# Altium PCB SB_Motor_Driver_Module.PcbDoc
Units mm, origin at the board's own origin, x right, y up, seen from the top; angles counter-clockwise.
Board outline 74.1 x 39.4 mm, 2 copper layers (Top Layer, Bottom Layer), stack 1.569 mm thick; 31 components, 21 nets, 86 pads, 7 vias.
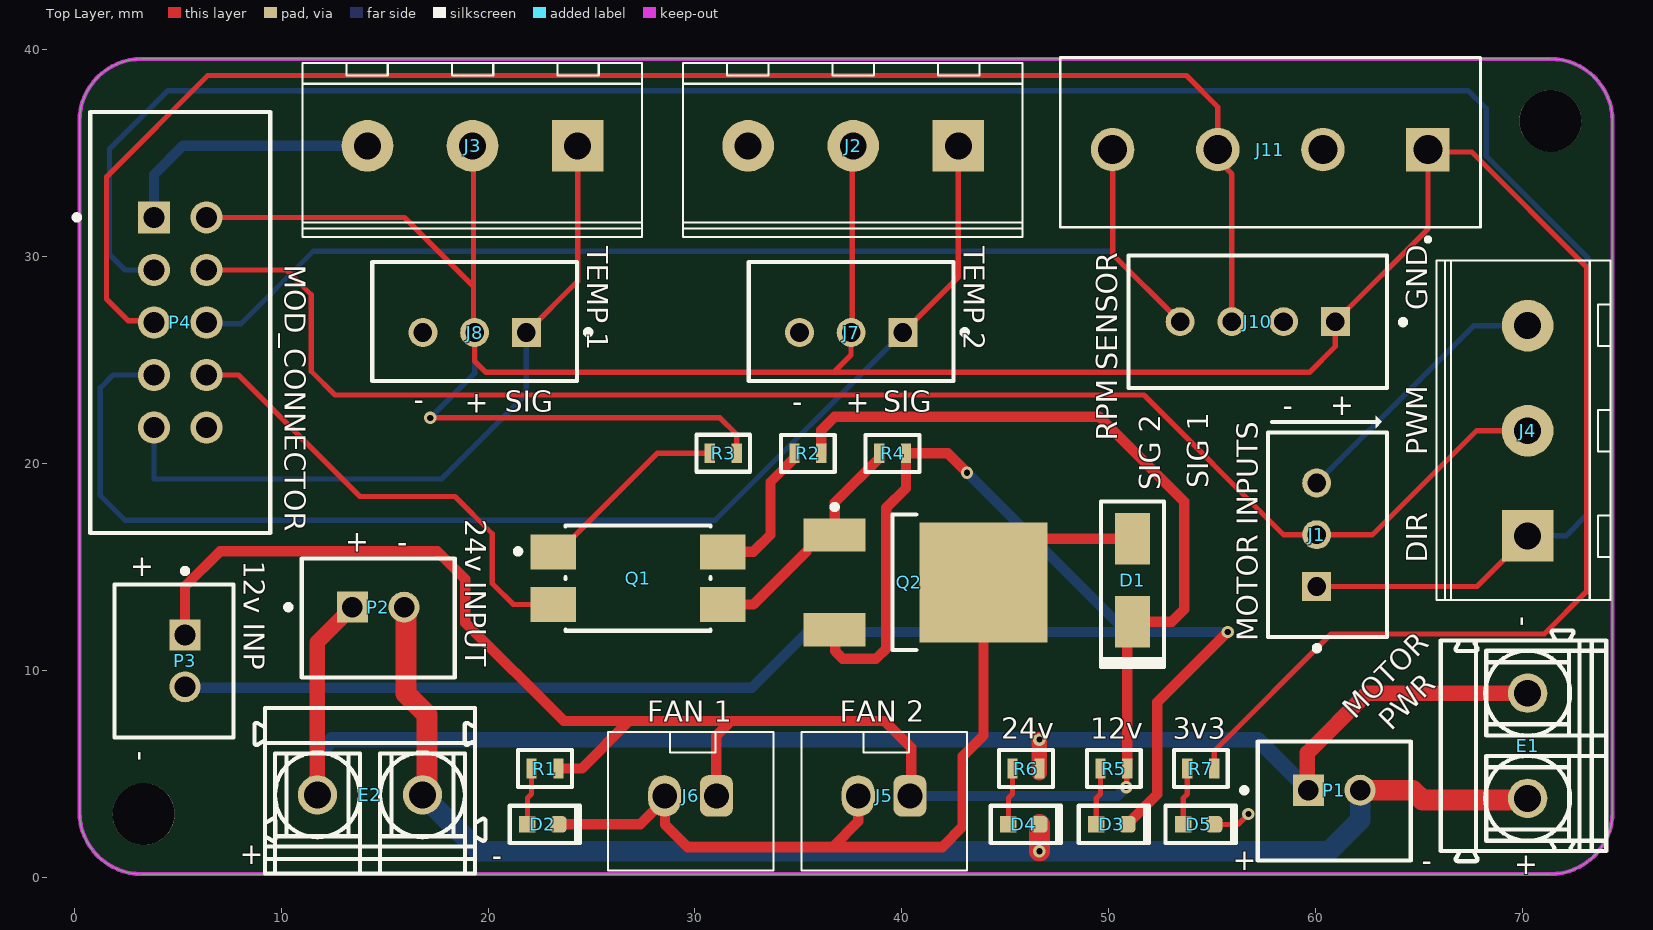
[diagram p0: Top Layer view]
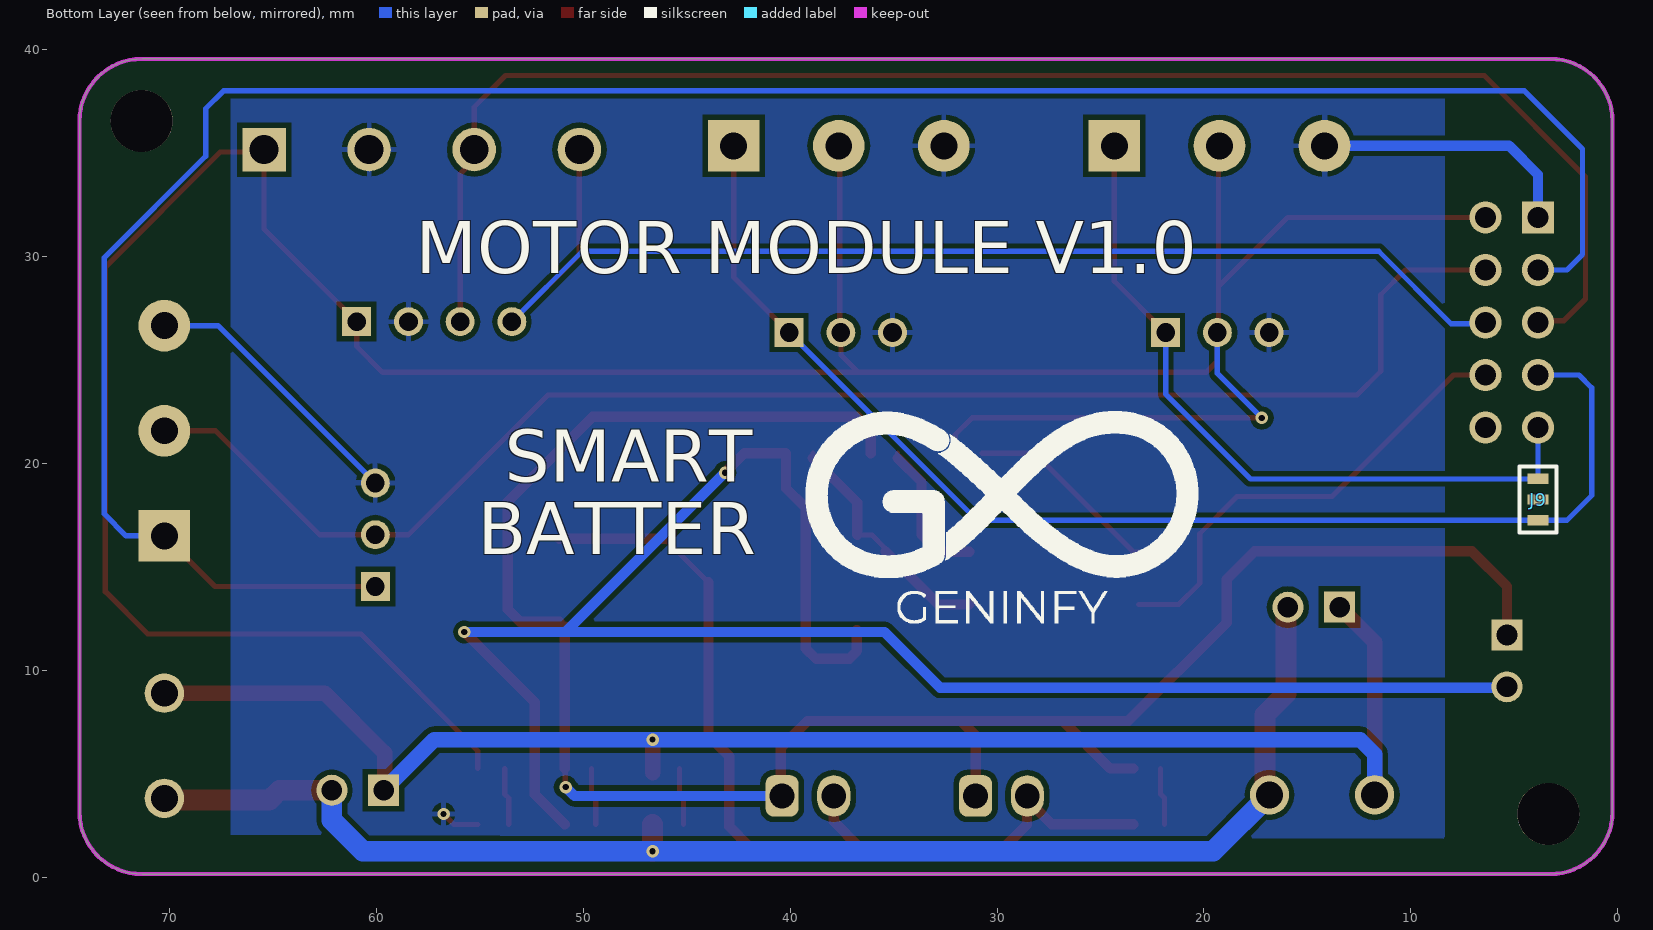
[diagram p1: Bottom Layer view, seen from below]
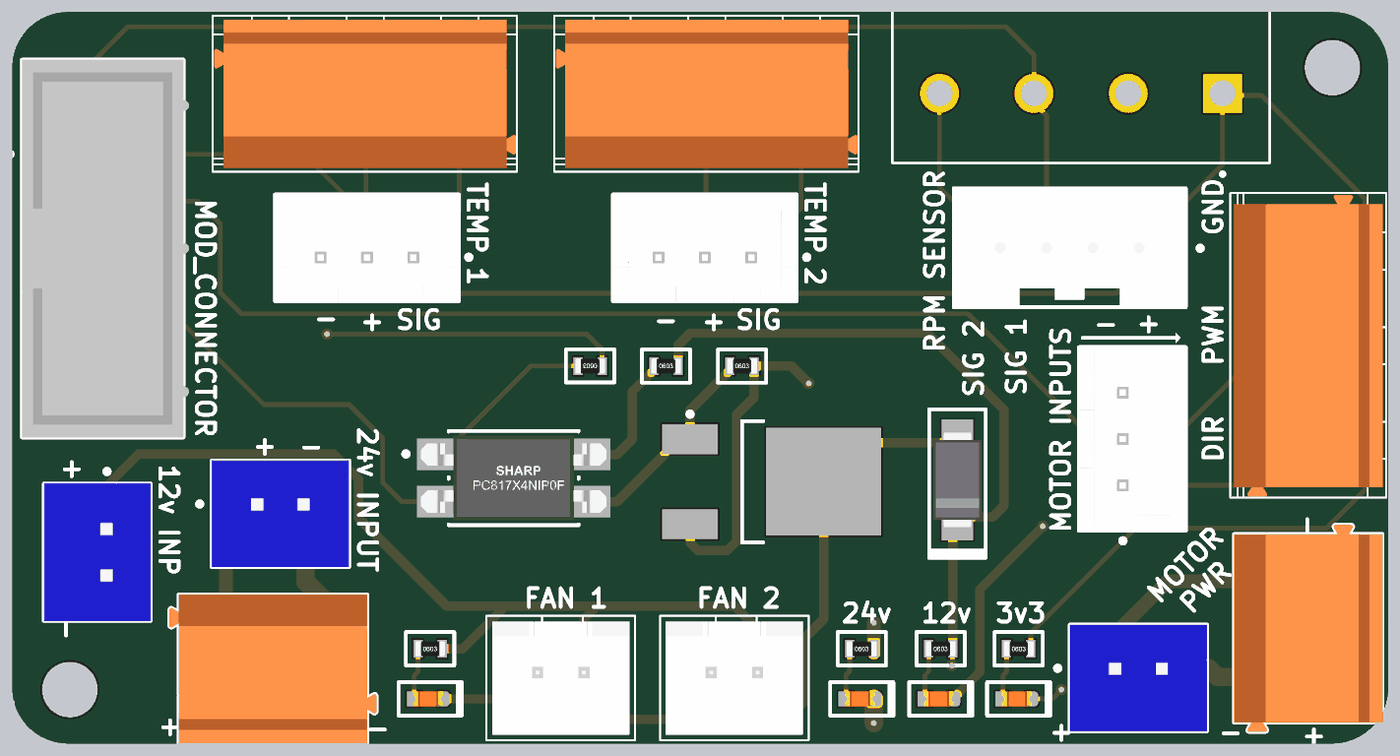
[diagram p2: 3D render of the assembled board from above, using the file's embedded part models]

## Layer stack, top to bottom
Top Solder: solder mask 0.0254, SM-001, Dk 4
Top Layer: signal copper 0.035
Dielectric 1: core 1.4986, Core-043, Dk 4.3
Bottom Layer: signal copper 0.035
Bottom Solder: solder mask 0.0254, SM-001, Dk 4

## Board outline
71.35,39.55 cw(c71.35,36.55) 74.35,36.55 74.35,3.15 cw(c71.35,3.15) 71.35,0.15 3.25,0.15 cw(c3.25,3.15) 0.25,3.15 0.25,36.55 cw(c3.25,36.55) 3.25,39.55

## Design rules (kind name [scope] priority, off if disabled: settings)
Clearance [All] p1: gap=0.254 ignorepadtopadclearanceinfootprint=FALSE
HoleSize [All] p1: absolutevalues=TRUE maxlimit=4 minlimit=0.025 maxpercent=80.000 minpercent=20.000
PolygonConnect [All] p1: connectstyle=Relief reliefconductorwidth=0.254 reliefentries=4 polygonreliefangle="90 Angle" airgapwidth=0.254
RoutingVias [All] p1: holewidth=0.711 width=1.27 viastyle="Through Hole" minholewidth=0.711 minwidth=1.27 maxholewidth=0.711 maxwidth=1.27
SilkToSolderMaskClearance [IsPad] p1: minsilkscreentomaskgap=0.2 clearancetoexposedcopper=TRUE
SolderMaskExpansion [All] p1: expansion=0.102 istentingtop=FALSE
Width [All] p1: maxlimit=2 minlimit=0.254 preferedwidth=0.254
28 further rules are at their usual default settings.

## Components (designator, comment, footprint, x,y, rotation, side; value= is the part's Value field where it differs from the comment)
D1 "1N4007" "M7 1N4007 SMA" 51.15,14.35 r270 top
D2 "LED - Orange" LED0603-Orange 22.65,2.55 r180 top
D3 "LED - Orange" LED0603-Orange 50.15,2.55 r180 top
D4 "LED - Orange" LED0603-Orange 45.9,2.55 r180 top
D5 "LED - Orange" LED0603-Orange 54.35,2.55 r180 top
E1 "1760490000" PM_5_08_90_02 70.05,6.35 r90 top
E2 "1760490000" PM_5_08_90_02 14.29,4.175 r0 top
J1 "B3B-XH-A(LF)(SN)" FP-B3B-XH-A_LF_SN-MFG 60.575,16.55 r90 top
J2 "Screw Terminal" "Screw Terminal 3P 5.08MM" 37.65,35.35 r180 top
J3 "Screw Terminal" "Screw Terminal 3P 5.08MM" 19.25,35.35 r180 top
J4 "Screw Terminal" "Screw Terminal 3P 5.08MM" 70.25,21.576 r90 top
J5 "JST-XH 2P" "JST-XH 2P" 39.141,3.925 r0 top
J6 "JST-XH 2P" "JST-XH 2P" 29.786,3.925 r0 top
J7 "B3B-XH-A(LF)(SN)" FP-B3B-XH-A_LF_SN-MFG 37.55,26.85 r180 top
J8 "B3B-XH-A(LF)(SN)" FP-B3B-XH-A_LF_SN-MFG 19.35,26.85 r180 top
J9 "Solder Jumper" "Solder Jumper" 3.85,18.25 r90 bottom
J10 "B04B-XASK-1(LF)(SN)" FP-B04B-XASK-1_LF_SN-MFG 57.2,26.85 r0 top
J11 "1776119-4" TE_1776119-4 57.81,35.168 r180 top
P1 "B2B-XH-A(LF)(SN)" JST-B2B-XH-A_V 60.9,4.2 r0 top
P2 "B2B-XH-A(LF)(SN)" JST-B2B-XH-A_V 14.69,13.05 r0 top
P3 "B2B-XH-A(LF)(SN)" JST-B2B-XH-A_V 5.35,10.45 r270 top
P4 "1-1634688-0" TECO-1-1634688-0-10_V 5.12,26.81 r270 top
Q1 "PC817X4NIP0F" FP-PC817X4NIP0F-MFG 27.25,14.45 r0 top
Q2 "NTD4805NT4G" ONSC-DPAK-3-369AA-01_V 41.15,14.25 r0 top
R1 "68R" "68R 0603" 22.75,5.25 r0 top
R2 "1k" "R0603 1k" 35.458,20.483 r0 top
R3 "1k" "R0603 1k" 31.367,20.483 r180 top
R4 "1k" "R0603 1k" 39.55,20.483 r0 top
R5 "68R" "68R 0603" 50.25,5.25 r0 top
R6 "68R" "68R 0603" 46,5.25 r0 top
R7 "68R" "68R 0603" 54.45,5.25 r0 top

## Footprints (in the part's own frame and the unit in brackets; to place one, negate y for a bottom-side part, rotate by r counter-clockwise, add the part's x,y. Pads: shape width x height; smd on the part's side, far side on the other; paste and mask are expansions set on the pad)
"68R 0603" [mm]
  rect 0.5x0.95 smd: 1(-0.65,0) 2(0.65,0)
  silkscreen extent -1.3,-0.9 1.3,0.9, body extent -0.8,-0.4 0.8,0.4, height 0.45
FP-B3B-XH-A_LF_SN-MFG [mm]
  rect 1.4x1.4 hole 0.9 paste-1000 mask+0: 1(-2.5,0.525)
  round 1.4 hole 0.9 paste-1000 mask+0: 2(0,0.525) 3(2.5,0.525)
  silkscreen extent -5.61,-2.88 4.95,2.88, body extent -5.05,-2.98 5.05,2.98, height 0.25
FP-B04B-XASK-1_LF_SN-MFG [mm]
  rect 1.4x1.4 hole 0.9 paste-1000 mask+0: 1(3.75,0)
  round 1.4 hole 0.9 paste-1000 mask+0: 2(1.25,0) 3(-1.25,0) 4(-3.75,0)
  silkscreen extent -6.25,-3.2 7.15,3.2, body extent -6.35,-3.3 6.35,3.3, height 0.25
FP-PC817X4NIP0F-MFG [mm]
  rect 2.2x1.7 smd paste+0 mask+0: 1(-4.1,1.27) 2(-4.1,-1.27) 3(4.1,-1.27) 4(4.1,1.27)
  silkscreen extent -5.92,-2.54 3.5,2.54, body extent -5.3,-2.64 5.3,2.64, height 0.25
JST-B2B-XH-A_V [mm] "Header, 2-Leads, Body 7.4x5.75mm, Pitch 2.5mm"
  rect 1.5x1.5 hole 1: 1(-1.25,0)
  round 1.5 hole 1: 2(1.25,0)
  silkscreen extent -4.47,-3.4 3.7,2.35, body extent -3.7,-3.4 3.7,2.35, height 7
"JST-XH 2P" [mm]
  rrect50% 1.6x2 hole 1.2: 1(1.25,0)
  oval 1.6x2 hole 1.2: 2(-1.25,0)
  silkscreen extent -4,-3.6 4,3.1, body extent -3.7,-3.3 3.7,2.8, height 7.01
LED0603-Orange [mm]
  rrect50% 0.8x0.8 smd: 1(-0.75,0)
  rect 0.8x0.8 smd: 2(0.75,0)
  silkscreen extent -1.8,-0.9 1.6,1, body extent -0.8,-0.4 0.8,0.4, height 0.7
"M7 1N4007 SMA" [mm]
  rect 2.5x1.7 smd: 1(-2,0) 2(2,0)
  silkscreen extent -3.8,-1.6 4.2,1.52, body extent -2.6,-1.3 2.6,1.3, height 2.42
ONSC-DPAK-3-369AA-01_V [mm] "DPAK, 3-Leads, Body 6.54x6.095mm, Pitch 2.29mm"
  rect 3x1.6 smd: 1(-4.4,2.29) 3(-4.4,-2.29)
  rect 6.2x5.8 smd: 4(2.8,0)
  silkscreen extent -4.52,-3.27 -0.45,3.76, body extent -1.6,-3.27 4.49,3.27, height 2.47
PM_5_08_90_02 [mm] "PM 5.08/02/90 3.5"
  round 1.9 hole 1.3: A1(-2.54,-0.2) A2(2.54,-0.2)
  silkscreen extent -5.58,-4 5.58,4, body extent -5.58,-4 5.58,4, height 10.01
"R0603 1k" [mm]
  rect 0.5x0.95 smd: 1(-0.65,0) 2(0.65,0)
  silkscreen extent -1.3,-0.9 1.3,0.89, body extent -0.8,-0.4 0.8,0.4, height 0.45
"Screw Terminal 3P 5.08MM" [mm]
  rect 2.5x2.5 hole 1.3: 1(-5.08,0)
  round 2.5 hole 1.3: 2(0,0) 3(5.08,0)
  silkscreen extent -8.18,-4 8.22,4.4, body extent -8.12,-3.8 8.12,4.2, height 10.01
"Solder Jumper" [mm]
  rect 0.5x1 smd: 1(-1,0) 2(0,0) 3(1,0)
  silkscreen extent -1.6,-0.9 1.6,0.9
TE_1776119-4 [mm]
  rect 2.1x2.1 hole 1.4: 1(-7.62,0)
  round 2.1 hole 1.4: 2(-2.54,0) 3(2.54,0) 4(7.62,0)
  silkscreen extent -10.16,-4.45 10.16,4.45
TECO-1-1634688-0-10_V [mm] "10-Pin Connector, Body 20.35x8.7mm, Pitch 2.54mm"
  rect 1.55x1.55 hole 1.02: 1(-5.08,-1.27)
  round 1.55 hole 1.02: 2(-5.08,1.27) 3(-2.54,-1.27) 4(-2.54,1.27) 5(0,-1.27) 6(0,1.27) 7(2.54,-1.27) 8(2.54,1.27) 9(5.08,-1.27) 10(5.08,1.27)
  silkscreen extent -10.18,-5.12 10.18,4.35, body extent -10.17,-4.35 10.18,4.65, height 9

## Part data
D1: library part 1N4007FLTR, "1000V 1A Rectifier", Manufacturer="Sangdest Microelectronics", Supplier Part Number 1=1655-1N4007FLCT-ND, Manufacturer Part Number=1N4007FLTR, Pricing 1="1=0.10000, 10=0.06600, 100=0.03120, 500=0.01848, 1000=0.01241 (USD)", RoHS=No, Stock 1=2517, Supplier 1=Digi-Key
D2 D3 D4 D5: library part LTST-C191KFKT, "LED ORANGE CLEAR SMD", Case Code (Imperial)=0603, Case Code (Metric)=1608, Color=Orange, Forward Current=30mA, Forward Voltage=2V, Lens Color=Colorless, Manufacturer="Vishay Lite-On", Max Operating Temperature=85°C, Min Operating Temperature=-55°C, Package Quantity=1, Power Dissipation=75mW, Reverse Voltage=5V, Supplier Part Number 1=160-1445-1-ND, Test Current=20mA, Case/Package=0603, Category=LEDs, ComponentLink1Description=https://datasheet.ciiva.com/2109/ltst-c191kfkt-2109968.pdf?src-supplier=Digi-Key, ComponentLink1URL=https://datasheet.ciiva.com/2109/ltst-c191kfkt-2109968.pdf?src-supplier=Digi-Key, ComponentLink2Description=https://datasheet.ciiva.com/12400/100-ltst-c191kfkt-39904-12400811.pdf?src-supplier=Mouser, ComponentLink2URL=https://datasheet.ciiva.com/12400/100-ltst-c191kfkt-39904-12400811.pdf?src-supplier=Mouser, ComponentLink3Description=https://datasheet.ciiva.com/11775/0900766b80dc02b0-11775613.pdf?src-supplier=RSComponents, ComponentLink3URL=https://datasheet.ciiva.com/11775/0900766b80dc02b0-11775613.pdf?src-supplier=RSComponents, ComponentLink4Description=https://datasheet.ciiva.com/15201/getdatasheetpartid-631075-15201391.pdf?src-supplier=Verical, ComponentLink4URL=https://datasheet.ciiva.com/15201/getdatasheetpartid-631075-15201391.pdf?src-supplier=Verical, ComponentLink5Description=https://datasheet.ciiva.com/2109/s-110-ltst-c191kfkt-2109969.pdf?src-supplier=Digi-Key, ComponentLink5URL=https://datasheet.ciiva.com/2109/s-110-ltst-c191kfkt-2109969.pdf?src-supplier=Digi-Key, Depth=0.8mm, Dominant Wavelength=605nm, Height=0.55mm, Illumination Color=Orange, Lead Free="Lead Free", Length=1.6mm, Lens Style=Diffused,Colorless,Rectangular, Lens Transparency=Clear, Luminous Intensity=90mcd, Manufacturer Part Number=LTST-C191KFKT, Mount="Surface Mount", Number of Elements=1, Number of LEDs=1, Number of Pins=2, Packaging="Tape and Reel", Power Rating=75mW, Pricing 1="1=0.24000, 10=0.17900, 100=0.08460, 500=0.05640, 1000=0.04418, 2500=0.04324 (USD)", Radiation Hardening=No, RoHS=Yes, Stock 1=92562, Supplier 1=Digi-Key, Viewing Angle=130°, Wavelength=611nm, Width=0.8mm
E1 E2: library part CMP-1559-01627-1, "OMNIMATE Signal - series PM", Colour=Orange, Manufacturer=Weidmueller, Rated_current_use_group_B_UL_1059="15 A", Rated_voltage_for_surge_voltage_class_pollution_degree_II_2="600 V", Rated_voltage_use_group_B_UL_1059="300 V", UL_94_flammability_rating=V-0, ComponentLink1Description="Manufacturer URL", ComponentLink1URL=http://www.weidmueller.com/, ComponentLink2Description="URL Link1", ComponentLink2URL=http://catalog.weidmueller.com/catalog/Start.do?localeId=en&ObjectID=1760490000, Contact_material=Cu-Leg, Contact_surface=tinned, Insulating_material="Wemid (PA)", Mounting_onto_the_PCB="Solder connection", No_of_poles=2, PackageReference=PM_5_08_90_02, Packaging=Box, PartNumber=1760490000, Pitch_inch="0,2 inch", Pitch_mm="5,08 mm", Qty="500 PCS", Revision=V1, Short_text_for_material="PM 5.08/02/90 3.5SN OR BX", Side_termination_characteristic="closed side", Solder_pin_length_mm="3,5 mm", Solid_max_H05_07_V_U="2,5 mm²", Solid_min_H05_07_V_U="0,13 mm²", Wire_cross_section_AWG_max_UL_1059="AWG 14", Wire_cross_section_AWG_min_UL_1059="AWG 26"
J1 J7 J8: library part CMP-17439-000014-1, "CONN HEADER VERT 3POS 2.5MM", Current Rating=3A, Manufacturer=JST, Package=0, Temperature="-25°C to +85°C", Temperature Range High=+85°C, Temperature Range Low=-25°C, Voltage Rating=250V, Automotive=No, Category=Conn, ComponentLink2Description=Datasheet, ComponentLink2URL=https://www.jst-mfg.com/product/pdf/eng/eXH.pdf, Conn Gender=Male, Conn Orientation=Vertical, Contact Material=Tin,Copper, Device Class L1=Connectors, Device Class L2="Headers and Wire Housings", Device Class L3=unset, Digikey Description="CONN HEADER VERT 3POS 2.5MM", Height=7mm, Lead Free=Yes, Manufacturer Part Number=B3B-XH-A(LF)(SN), Number of Contacts=3, Number Of Rows=1, Octopart=https://octopart.com/b3b-xh-a%28lf%29%28sn%29-jst-3990185, Pitch=2.5mm, RoHS=TRUE
J2 J3 J4: library part OSTTC032162, "TERM BLK 3P SIDE ENT 5.08MM PCB", Color=Blue, Current=15A, Flammability Rating="UL94 V-0", Manufacturer="On-Shore Technology", Max Operating Temperature=105°C, Min Operating Temperature=-30°C, Supplier Part Number 1=ED2610-ND, Voltage=300V, Category="Terminal Blocks", ComponentLink1Description=https://datasheet.ciiva.com/823/osttcxx2162-823568.pdf?src-supplier=Digi-Key, ComponentLink1URL=https://datasheet.ciiva.com/823/osttcxx2162-823568.pdf?src-supplier=Digi-Key, ComponentLink2Description=https://datasheet.ciiva.com/19458/2120655-19458972.pdf?src-supplier=Jameco, ComponentLink2URL=https://datasheet.ciiva.com/19458/2120655-19458972.pdf?src-supplier=Jameco, Contact Material=Brass, Contact Plating=Tin, Height=10mm, Housing Color=Blue, Housing Material=Thermoplastic, Lead Free="Lead Free", Length=15.2mm, Manufacturer Part Number=OSTTC032162, Max Current Rating=15A, Mount="Through Hole", Number of Contacts=3, Number of Levels=1, Number of Positions=3, Number of Positions Per Level=3, Number Of Rows=1, Packaging=Bulk, Pitch=0.2inch, Plating=Steel, Pricing 1="1=0.85000, 10=0.53000, 25=0.45400, 50=0.40800, 100=0.39950, 250=0.34000, 500=0.32300, 1000=0.28900, 5000=0.22610 (USD)", RoHS=Yes, Stock 1=3645, Supplier 1=Digi-Key, Termination=Screw, Width=7.6mm, Wire Gauge (Max)=22AWG, Wire Gauge (Min)=14AWG
J5 J6: library part B2B-XH-A(LF)(SN), "JST-XH 2 POS 2.5mm Solder ST Thru-Hole Box", Color=Natural, Contact Resistance=20mR, Current Rating=3A, Housing Color=White, Insulation Resistance=1GR, Manufacturer=JST, Max Operating Temperature=85°C, Max Voltage Rating (AC)=250V, Min Operating Temperature=-25°C, Supplier Part Number 1=1516276, Category="FFC / FPC", ComponentLink1Description=https://datasheet.ciiva.com/26894/getdatasheetpartid-640357-26894434.pdf?src-supplier=Verical, ComponentLink1URL=https://datasheet.ciiva.com/26894/getdatasheetpartid-640357-26894434.pdf?src-supplier=Verical, ComponentLink2Description=https://datasheet.ciiva.com/11746/0900766b8082653e-11746979.pdf?src-supplier=RSComponents, ComponentLink2URL=https://datasheet.ciiva.com/11746/0900766b8082653e-11746979.pdf?src-supplier=RSComponents, ComponentLink3Description=https://datasheet.ciiva.com/26894/getdatasheetpartid-385291-26894760.pdf?src-supplier=Verical, ComponentLink3URL=https://datasheet.ciiva.com/26894/getdatasheetpartid-385291-26894760.pdf?src-supplier=Verical, ComponentLink4Description=https://datasheet.ciiva.com/8052/5448-8052024.pdf?src-supplier=Element14, ComponentLink4URL=https://datasheet.ciiva.com/8052/5448-8052024.pdf?src-supplier=Element14, ComponentLink5Description=https://datasheet.ciiva.com/20207/523653-20207167.pdf?src-supplier=Rapid+Electronics, ComponentLink5URL=https://datasheet.ciiva.com/20207/523653-20207167.pdf?src-supplier=Rapid+Electronics, Connector Type="Male Pin", Contact Material=Brass, Contact Plating=Tin,Copper,Lead, Depth=5.75mm, Fastening Type=Detent, Housing Material=Polyamide, Lead Free="Lead Free", Lead Pitch=2.5mm, Length=7.4mm, Manufacturer Part Number=B2B-XH-A(LF)(SN), Max Current Rating=3A, Max Voltage Rating (DC)=250V, Mount="Through Hole", Number of Contacts=2, Number of Positions=2, Number Of Rows=1, Orientation=Straight, Packaging=Bulk, Pitch=2.5mm, REACH SVHC="No SVHC", RoHS=Yes, Stock 1=165899, Supplier 1=Element14, Termination=Solder, Voltage Rating=250V, Voltage Rating (AC)=250V, Wire/Cable Gauge=22AWG
J10: library part CMP-17439-000018-1, "CONN HEADER VERT 4POS 2.5MM", Current Rating=3A, Manufacturer=JST, Temperature="-25°C to +85°C", Temperature Range High=+85°C, Temperature Range Low=-25°C, Voltage Rating=250V, Automotive=No, Category=Conn, ComponentLink2Description=Datasheet, ComponentLink2URL=http://www.jst-mfg.com/product/pdf/eng/eXA1.pdf, Conn Gender=Male, Conn Orientation=Straight, Contact Material=Tin,Copper, Device Class L1=Connectors, Device Class L2="Headers and Wire Housings", Device Class L3=unset, Digikey Description="CONN HEADER VERT 4POS 2.5MM", Height=8.8mm, Lead Free=Yes, Manufacturer Part Number=B04B-XASK-1(LF)(SN), Number of Contacts=4, Number Of Rows=1, Octopart=https://octopart.com/b04b-xask-1%28lf%29%28sn%29-jst-3990149, Package=B04B-XASK-1(LF)(SN), Pitch=2.5mm, RoHS=TRUE
J11: "4P TERMI-BLOK,PCB,HIGH TEMP", Package=None, Availability=Unavailable, Centerline_Pitch="5.08 mm[.2 in]", MF="TE Connectivity", MP=1776119-4, Number_of_Positions=4, Price=None, SnapEDA_Link=https://www.snapeda.com/parts/1776119-4/TE%20Connectivity/view-part/2470853/?ref=snap, TE_purchase_URL=https://www.te.com/usa-en/product-1776119-4.html?te_bu=Cor&te_type=disp&te_campaign=seda_glo_cor-seda-global-disp-prtnr-fy19-seda-model-bom-cta_sma-317_1&elqCampaignId=32493
P1 P2 P3: library part CMP-2000-05888-1, "Male Header, Pitch 2.5 mm, 1 x 2 Position, Height 7 mm, Tail Length 3.4 mm, -25 to 85 degC, RoHS, Bulk", Manufacturer=JST, Package Description="Male Header, Pitch 2.5 mm, 1 x 2 Position, Height 7 mm, Tail Length 3.4 mm", Package Reference=B2B-XH-A, Datasheet URL=http://www.jst-mfg.com/product/pdf/eng/eXH.pdf, Datasheet Version=05/2016, Manufacturer URL=http://www.jst.com/home2.html, Mounting Technology=ThroughHole, No of Positions=2, Pitch=2.5mm, Style/Orientation=StraightHeader/Plug, Termination=Crimp, Type=ShroudedHeader
P4: library part CMP-2000-05854-1, "Male Header, Pitch 2.54 mm, 2 x 5 Postion, Height 9.15 mm, Tail Length 3.2 mm, -40 to 105 degC, RoHS, Bulk", Manufacturer="TE Connectivity", Package Description="10-Pin Connector, Body 20.35 x 8.7 mm, Pitch 2.54 mm", Package Version="Rev. C2, 02/2011", Contact Material=Brass, Contact Plating=GoldPlatedContacts, Contact Termination Type=ThroughHole, Datasheet URL=https://datasheet.ciiva.com/6831/eng-cd-1634688-c2-6831201.pdf, Datasheet Version="Rev. C2, 02/2011", Gender=Header, Manufacturer URL=http://www.te.com/, Mounting Technology=ThroughHole, No. of Contacts=10Contacts, No. of Positions=10, No. of Rows=2, Orientation=Straight, Package Reference=1-1634688-0, Package URL=https://datasheet.ciiva.com/6831/eng-cd-1634688-c2-6831201.pdf, PartNumber=1-1634688-0, Pitch=2.54mm, Pitch Spacing=2.54mm, Product Range=-, SVHC=ToBeAdvised
Q1: library part CMP-65434-000001-1, "OPTOISOLATOR 5KV TRANS 4SMD", Collector Emitter Voltage=80V, Emiiter Collector Voltage=6V, Forward Current=20mA, Forward Voltage=1.2V, Isolation Voltage=5kVrms, Manufacturer=Sharp, Max Current Transfer Ratio=600%, Min Current Transfer Ratio=50%, Power Dissipation=200mW, Temperature="-30°C to +100°C", Temperature Range High=+100°C, Temperature Range Low=-30°C, Automotive=No, Category=Trans, ComponentLink2Description=Datasheet, ComponentLink2URL=https://www.sharpsde.com/fileadmin/products/Optoelectronics/Isolation%20Devices/Specs%20Photocoupler/PC817XxNIP0F_17Jun08_Spec_ED-04P129A.pdf, Device Class L1=Optoelectronics, Device Class L2=Optocouplers, Device Class L3=unset, Digikey Description="OPTOISOLATOR 5KV TRANS 4SMD", Height=4.6mm, Lead Free=Yes, Manufacturer Part Number=PC817X4NIP0F, Mouser Description="Transistor Output Optocouplers Photocoupler 300-600% CRT", Octopart=https://octopart.com/pc817x4nip0f-sharp-20650453, Package=PC817X4NIP0F, Reverse Voltage=6V, RoHS=TRUE, Standoff Height=0.1mm
Q2: library part CMP-1058-00313-1, "Power MOSFET, 30 V, 88 A, Single N-Channel, 3-Pin DPAK, Pb-Free, Tape and Reel", Manufacturer="On Semiconductor", Package Type="DPAK-3, IPAK-4", Channel Polarity="N Channel", Ciss Typ (pF)=2865, ComponentLink1Description="Manufacturer URL", ComponentLink1URL=http://www.onsemi.com/, ComponentLink2Description=Datasheet, ComponentLink2URL=http://www.onsemi.cn/pub_link/Collateral/NTD4805N-D.PDF, ComponentLink3Description="Package Specification", ComponentLink3URL=http://www.onsemi.cn/pub_link/Collateral/369AA.PDF, Configuration=Single, Coss Typ (pF)=610, Crss Typ (pF)=338, DatasheetVersion="Rev. 7", ID Max (A)=88, Mounting Technology="Surface Mount", PackageDescription="3-Pin Flange Mount, Body 6.54 x 6.095 mm, Pitch 2.29 mm", PackageReference=DPAK-3-369AA-01, PackageVersion="Rev. B, 06/2010", Packing="Tape and Reel", PartNumber=NTD4805NT4G, Qrr Typ (nC)=18, RoHS=Pb-Free, V(BR)DSS Min (V)=30, VGS Max (V)=20, VGS(th) Max (V)=2.5
R1 R5 R6 R7: library part CRGP0603F68R, "CRGP 0603 68R 1%", Case Code (Imperial)=0603, Case Code (Metric)=1608, Manufacturer="TE Connectivity", Max Operating Temperature=155°C, Max Power Dissipation=250mW, Min Operating Temperature=-55°C, Resistor Type="Thick Film", Supplier Part Number 1=A130402CT-ND, Temperature Coefficient=200ppm/°C, Tolerance=1%, Case/Package=0603, Category="Chip SMD Resistors", ComponentLink1Description=https://www.te.com/commerce/DocumentDelivery/DDEController?Action=srchrtrv&amp;DocNm=9-1773463-9&amp;DocType=DS&amp;DocLang=English&src-supplier=Digi-Key, ComponentLink1URL=https://www.te.com/commerce/DocumentDelivery/DDEController?Action=srchrtrv&amp;DocNm=9-1773463-9&amp;DocType=DS&amp;DocLang=English&src-supplier=Digi-Key, Manufacturer Part Number=CRGP0603F68R, Number of Terminations=2, Packaging="Tape and Reel", Pricing 1="1=0.14000, 10=0.11400, 100=0.04470, 1000=0.01870, 2500=0.01714 (USD)", Resistance=68R, RoHS=No, Stock 1=49308, Supplier 1=Digi-Key
R2 R3 R4: library part CRGCQ0603F1K0, "0603 1k Ohm 1% 1/10W", Case Code (Imperial)=0603, Case Code (Metric)=1608, Manufacturer="TE Connectivity", Max Operating Temperature=155°C, Max Power Dissipation=100mW, Min Operating Temperature=-55°C, Resistance=1kR, Resistor Type="Thick Film", Supplier Part Number 1=A129688CT-ND, Temperature Coefficient=100ppm/°C, Tolerance=1%, Case/Package=0603, Category="Chip SMD Resistors", ComponentLink1Description=https://www.te.com/commerce/DocumentDelivery/DDEController?Action=srchrtrv&DocNm=1773204-3&DocType=DS&DocLang=English&src-supplier=Digi-Key, ComponentLink1URL=https://www.te.com/commerce/DocumentDelivery/DDEController?Action=srchrtrv&DocNm=1773204-3&DocType=DS&DocLang=English&src-supplier=Digi-Key, ComponentLink2Description=https://4donline.ihs.com/images/VipMasterIC/IC/TYEL/TYEL-S-A0004929575/TYEL-S-A0004929575-1.pdf?hkey=52A5661711E402568146F3353EA87419&src-supplier=Farnell, ComponentLink2URL=https://4donline.ihs.com/images/VipMasterIC/IC/TYEL/TYEL-S-A0004929575/TYEL-S-A0004929575-1.pdf?hkey=52A5661711E402568146F3353EA87419&src-supplier=Farnell, ComponentLink3Description=https://www.te.com/commerce/DocumentDelivery/DDEController?Action=srchrtrv&amp;DocNm=1773204-3&amp;DocType=DS&amp;DocLang=English&src-supplier=Digi-Key, ComponentLink3URL=https://www.te.com/commerce/DocumentDelivery/DDEController?Action=srchrtrv&amp;DocNm=1773204-3&amp;DocType=DS&amp;DocLang=English&src-supplier=Digi-Key, ComponentLink4Description=https://4donline.ihs.com/images/VipMasterIC/IC/TYEL/TYEL-S-A0004929575/TYEL-S-A0004929575-1.pdf?hkey=52A5661711E402568146F3353EA87419&src-supplier=Element14, ComponentLink4URL=https://4donline.ihs.com/images/VipMasterIC/IC/TYEL/TYEL-S-A0004929575/TYEL-S-A0004929575-1.pdf?hkey=52A5661711E402568146F3353EA87419&src-supplier=Element14, ComponentLink5Description=https://4donline.ihs.com/images/VipMasterIC/IC/TYEL/TYEL-S-A0004929575/TYEL-S-A0004929575-1.pdf?hkey=52A5661711E402568146F3353EA87419&src-supplier=Newark, ComponentLink5URL=https://4donline.ihs.com/images/VipMasterIC/IC/TYEL/TYEL-S-A0004929575/TYEL-S-A0004929575-1.pdf?hkey=52A5661711E402568146F3353EA87419&src-supplier=Newark, Features="Moisture Resistant,Automotive AEC-Q200", Manufacturer Part Number=CRGCQ0603F1K0, Number of Terminations=2, Packaging="Cut Tape", Pricing 1="1=0.10000, 10=0.02700, 100=0.01090, 1000=0.00490, 2500=0.00426 (USD)", RoHS=No, Stock 1=37973, Supplier 1=Digi-Key

## Free pads (board coordinates)
  round 3 hole 3 unplated: ""(3.35,3.05) ""(71.35,36.55)

## Via types
v1: diameter 0.6, hole 0.3, Top Layer to Bottom Layer, tented both sides, 7 vias

## Nets (pads, with @x,y where several pads share a name; then routed paths per layer and width w, separated by ;. In a path a pad name is that pad's centre, name@x,y a point inside that pad or via, vN(x,y) a via of type N, cw(c..) or ccw(c..) an arc to the next point about the centre after c; other vN are vias at no path point)
+3V3: J2.2 J3.2 J7.2 J8.2 J10.1 J11.1 P4.2 R3.1 R7.2 | length 158.6
  Top Layer w0.254: P4.2 15.96,31.89 19.3,28.55 ; v1(17.2,22.2) 31.205,22.2 32.017,21.388 R3.1 ; J3.2@19.3,35.35 19.3,28.55 ; J2.2 37.6,35.3 37.6,26.375 J7.2 37.544,26.319 37.544,25.244 36.7,24.4 ; R7.2 55.1,6.1 60.75,11.75 71.05,11.75 73.1,13.8 73.1,29.5 67.55,35.05 65.548,35.05 J11.1 65.43,31.33 J10.1 60.95,25.65 59.7,24.4 36.7,24.4 ; 19.3,28.55 19.3,26.375 J8.2 19.35,24.95 19.9,24.4 36.7,24.4
  Bottom Layer w0.254: v1(17.2,22.2) 19.35,24.35 J8.2
+12V: D1.2 J5.1 J6.1 P3.1 R1.2 R2.2 R5.2 | length 101.3
  Top Layer w0.254: J5.1 J5.1@40.45,3.984 ; v1(50.85,4.35) 50.875,4.375 50.875,5.225 R5.2 ; D1.2@50.9,12.1 D1.2
  Top Layer w0.5: P3.1 5.35,14.05 7.05,15.75 17.55,15.75 18.9,14.4 18.9,12.3 23.65,7.55 26.82,7.55 ; R1.2 24.52,5.25 26.82,7.55 ; J6.1 31.036,6.836 31.75,7.55 ; R2.2 36.109,21.609 36.75,22.25 49.55,22.25 53.65,18.15 53.65,12.95 53.05,12.35 D1.2 ; J5.1@40.45,3.984 40.45,6.25 39.15,7.55 31.75,7.55 ; R5.2 D1.2@50.9,12.1 ; 26.82,7.55 31.75,7.55
  Bottom Layer w0.5: J5.1 50.425,3.925 v1(50.85,4.35)
+24V: E1.A2 E2.A1 P1.1 P2.1 R6.2 | length 76.5
  Top Layer w0.75: E2.A1 11.75,11.36 P2.1 ; R6.2@46.65,5.05 R6.2 v1(46.65,6.65) ; P1.1@59.6,3.95 59.6,6 62.49,8.89 E1.A2
  Bottom Layer w0.75: E2.A1 11.75,5.95 12.45,6.65 v1(46.65,6.65) 57.2,6.65 P1.1
DIR: J1.1 J4.1 P4.3 | length 111.8
  Top Layer w0.254: J1.1 67.804,14.05 J4.1
  Bottom Layer w0.254: P4.3 2.45,29.35 1.7,30.1 1.7,35.2 4.505,38.005 67.395,38.005 68.25,37.15 68.25,34.85 73.15,29.95 73.15,17.55 72.096,16.496 J4.1
FAN: P4.8 Q1.2 | length 22.8
  Top Layer w0.254: P4.8 7.93,24.27 8.95,23.25 13.8,18.4 18.4,18.4 20.2,16.6 20.2,14.2 21.22,13.18 Q1.2
GND: D5.1 J1.3 J2.3 J3.3 J4.3 J7.3 J8.3 J10.2 J11.2 P4.1 | length 28.4
  Top Layer w0.254: D5.1 56.25,2.55 v1(56.75,3.05)
  Bottom Layer w0.254: J1.3 67.656,26.656 J4.3
  Bottom Layer w0.5: P4.1@3.85,31.685 3.85,33.95 5.25,35.35 J3.3
MGND: D4.1 E1.A1 E2.A2 P1.2 P2.2 | length 67.8
  Top Layer w0.254: P1.2@61.978,3.65 P1.2@62.15,3.65
  Top Layer w1: P2.2 16.036,12.954 16.036,8.864 17.05,7.85 17.05,4.439 16.83,4.219 E2.A2 ; v1(46.65,1.25) D4.1 ; P1.2 64.7,4.2 65.17,3.73 E1.A1@70.17,3.73
  Bottom Layer w1: E2.A2 19.555,1.25 60.65,1.25 62.15,2.75 P1.2
NetD1_1: D1.1 D2.1 J5.2 J6.2 Q2.4 | length 45.6
  Top Layer w0.254: J6.2 28.55,3.911 J6.2@28.55,3.739 ; Q2.4 Q2.4@46.05,16.35
  Top Layer w0.5: D2.1 27.361,2.55 28.55,3.739 28.55,2.55 29.65,1.45 36.65,1.45 ; J5.2 37.891,2.691 36.65,1.45 ; Q2.4 43.95,6.85 42.95,5.85 42.95,2.45 41.95,1.45 36.65,1.45 ; Q2.4@46.05,16.35 D1.1
NetD2_2: D2.2 R1.1 | length 2.8
  Top Layer w0.254: D2.2 21.9,3.824 22.1,4.024 R1.1
NetD3_2: D3.2 R5.1 | length 2.8
  Top Layer w0.254: D3.2 49.4,3.824 49.6,4.024 R5.1
NetD4_2: D4.2 R6.1 | length 2.8
  Top Layer w0.254: D4.2 45.15,3.824 45.35,4.024 R6.1
NetD5_2: D5.2 R7.1 | length 2.8
  Top Layer w0.254: D5.2 53.6,3.824 53.8,4.024 R7.1
NetQ1_1: Q1.1 R3.2 | length 9.5
  Top Layer w0.254: Q1.1 23.4,15.72 28.163,20.483 R3.2
NetQ1_3: Q1.3 Q2.1 R4.1 | length 11.7
  Top Layer w0.254: 35.377,15.726 35.377,15.867 36.05,16.54 Q2.1 ; R4.1@38.9,20.258 R4.1
  Top Layer w0.5: Q1.3 32.831,13.18 35.377,15.726 ; Q2.1 36.75,18.108 R4.1@38.9,20.258
NetQ1_4: Q1.4 R2.1 | length 7.1
  Top Layer w0.254: R2.1@34.809,20.258 R2.1
  Top Layer w0.5: Q1.4 32.82,15.72 33.65,16.55 33.65,19.1 R2.1@34.809,20.258
PGND: D3.1 P3.2 Q2.3 R4.2 | length 90.8
  Top Layer w0.254: Q2.3 Q2.3@36.772,11.938
  Top Layer w0.5: Q2.3@36.772,11.938 36.772,10.928 37.15,10.55 38.75,10.55 39.25,11.05 39.25,17.85 40.2,18.8 R4.2 42.217,20.483 v1(43.15,19.55) ; D3.1 52.35,4 52.35,8.45 v1(55.75,11.85)
  Bottom Layer w0.5: P3.2@5.35,9.15 32.75,9.15 35.45,11.85 50.85,11.85 ; v1(43.15,19.55) 50.85,11.85 ; v1(55.75,11.85) 50.85,11.85
PWM: J1.2 J4.2 P4.4 | length 73.4
  Top Layer w0.254: P4.4 10.25,29.35 11.45,28.15 11.45,24.45 12.6,23.3 51.7,23.3 58.45,16.55 J1.2 62.75,16.55 67.776,21.576 J4.2
SIG_1: J10.3 J11.3 P4.5 | length 75.7
  Top Layer w0.254: P4.5 3.763,26.897 2.603,26.897 1.55,27.95 1.55,33.85 6.45,38.75 53.75,38.75 55.27,37.23 J11.3 55.27,34.669 55.95,33.989 J10.3
SIG_2: J10.4 J11.4 P4.6 | length 59.6
  Top Layer w0.254: J11.4 50.19,30.11 J10.4
  Bottom Layer w0.254: P4.6 6.45,26.75 8.05,26.75 11.55,30.25 50.05,30.25 J10.4
TEMP_A: J2.1 J7.1 J9.1 P4.7 | length 61.4
  Top Layer w0.254: J7.1 42.73,29.005 J2.1
  Bottom Layer w0.254: P4.7@4.04,24.27 1.87,24.27 1.25,23.65 1.25,18.45 2.45,17.25 J9.1 30.975,17.25 J7.1
TEMP_B: J3.1 J8.1 J9.3 P4.9 | length 35.2
  Top Layer w0.254: J8.1 24.33,28.805 J3.1
  Bottom Layer w0.254: P4.9 J9.3 17.75,19.25 21.85,23.35 J8.1
pads on no net: J9.2 P4.10

## Polygon pours and split planes (outlines as drawn)
GND on Bottom Layer "GND_L02_P000" (solid, pour order 0): 67.05,2.054 67.05,37.75 8.35,37.75 8.35,1.858

## Keep-outs
Keep-Out Layer:
  the board outline again, w0.2

## Silkscreen, mask and mechanical layers (free items; w line width, h text height)
Top Overlay:
  region: 63.2,22 62.9,21.7 62.9,22.3
  lines w0.2: 57.9,22 62.9,22
  text "TEMP 1" at 24.8,30.5 h1 r270
  text "TEMP 2" at 43,30.5 h1 r270
  text "MOD_CONNECTOR" at 10.167,29.6 h1 r270
  text "GND" at 65.4,27.4 h1 r90
  text "-" at 16.4,22.6 h1
  text "SIG" at 20.8,22.5 h1
  text "-" at 34.7,22.5 h1
  text "SIG" at 39.1,22.5 h1
  text "+" at 18.88,22.448 h1
  text "+" at 37.28,22.448 h1
  text "+" at 60.7,22.333 h1
  text "-" at 58.4,22.3 h1
  text "RPM SENSOR" at 50.4,21.1 h1 r90
  text "PWM" at 65.4,20.4 h1 r90
  text "SIG 1" at 54.8,18.8 h1 r90
  text "SIG 2" at 52.5,18.7 h1 r90
  text "24v INPUT" at 18.9,17.3 h1 r270
  text "+" at 13.1,15.733 h1
  text "-" at 15.6,15.7 h1
  text "12v INP" at 8.2,15.3 h1 r270
  text "DIR" at 65.4,15.2 h1 r90
  text "+" at 2.7,14.533 h1
  text "-" at 69.6,12.6 h1 r270
  text "MOTOR INPUTS" at 57.2,11.4 h1 r90
  text "MOTOR" at 61.9,7.583 h1 r45
  text "FAN 1" at 27.7,7.5 h1
  text "FAN 2" at 37,7.5 h1
  text "PWR" at 63.65,7.033 h1 r45
  text "24v" at 44.8,6.7 h1
  text "12v" at 49.1,6.7 h1
  text "3v3" at 53.1,6.7 h1
  text "-" at 3.533,5.6 h1 r90
  text "-" at 20.681,1.294 h1 r180
  text "+" at 8,0.633 h1
  text "+" at 56,0.333 h1
  text "-" at 65.119,0.306 h1
  text "+" at 69.6,0.133 h1
Bottom Overlay:
  drawing of 9 lines, arcs and shapes, not listed
  text "MOTOR MODULE V1.0" at 58.1,29.2 h2.5
  text "SMART" at 53.8,19.1 h2.5
  text "BATTER" at 55.1,15.6 h2.5